# Altium PCB USB_HUB.PcbDoc
Units mm, origin at the board's own origin, x right, y up, seen from the top; angles counter-clockwise.
Board outline 67.31 x 59.69 mm, 4 copper layers (Top Layer, GND_1, GND_2, Bottom Layer), stack 0.603 mm thick; 57 components, 33 nets, 192 pads, 59 vias.
Unrouted connection lines stored in the file: 5.
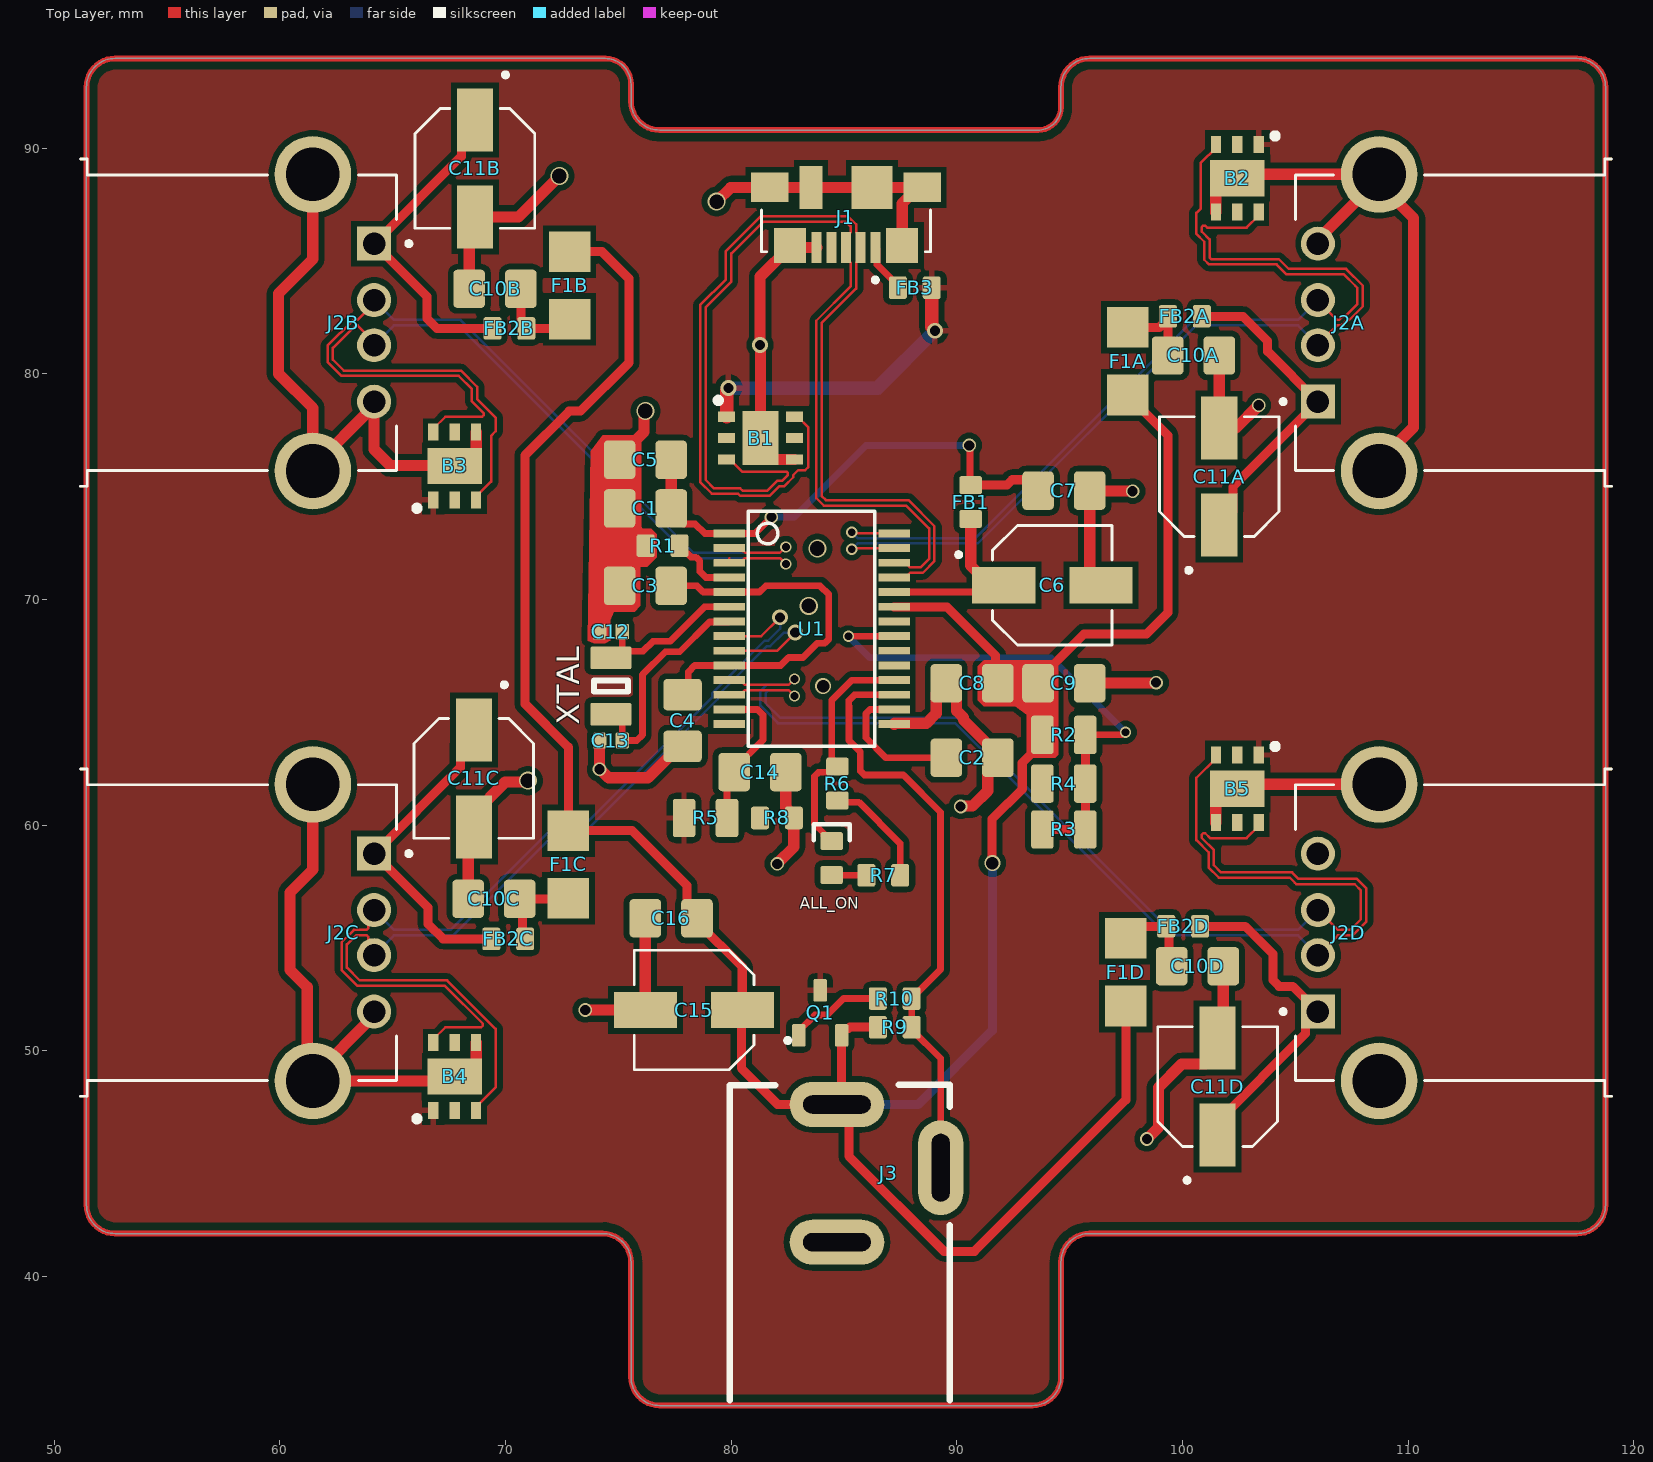
[diagram p0: Top Layer view]
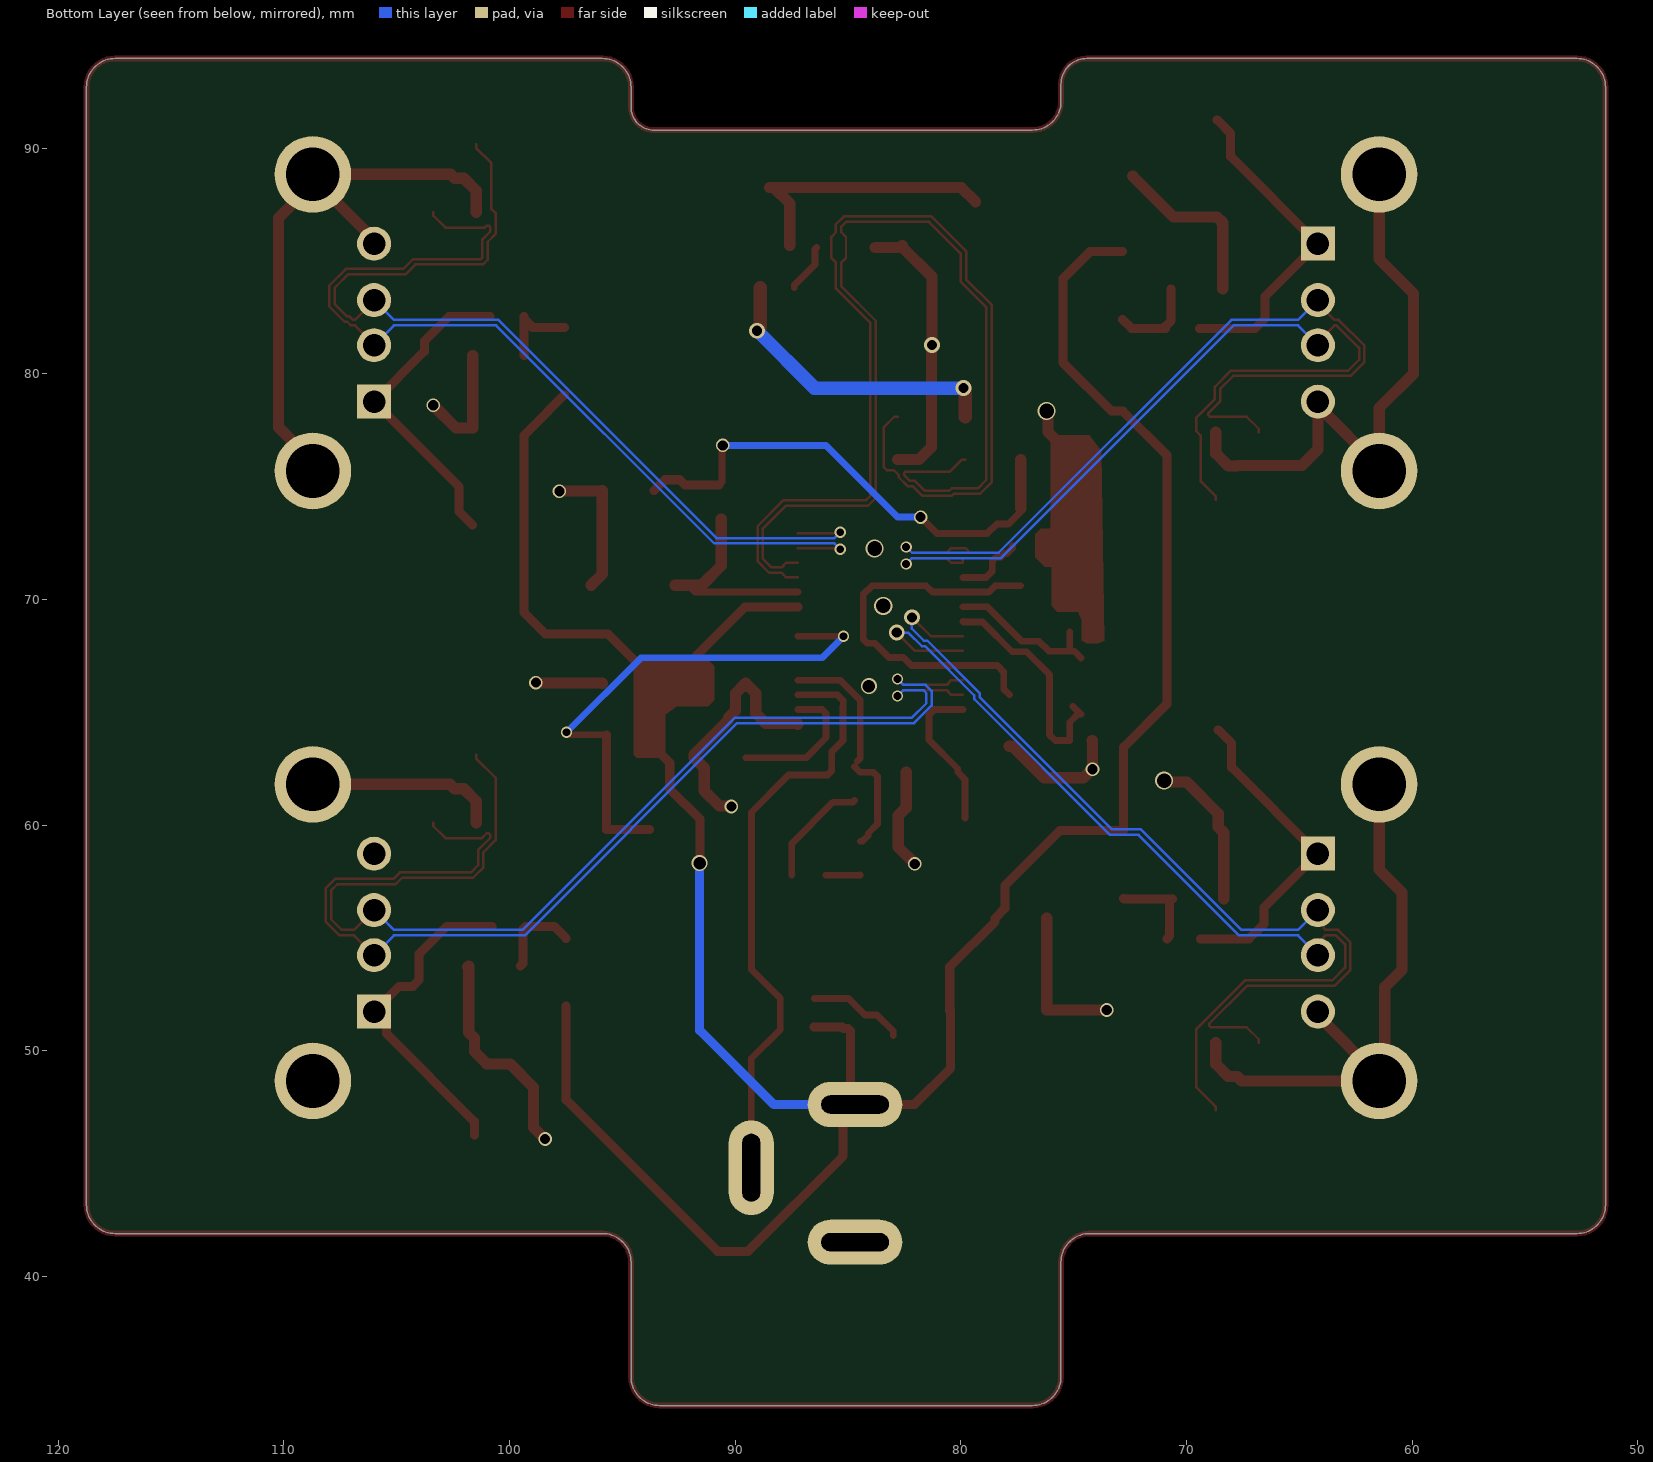
[diagram p1: Bottom Layer view, seen from below]
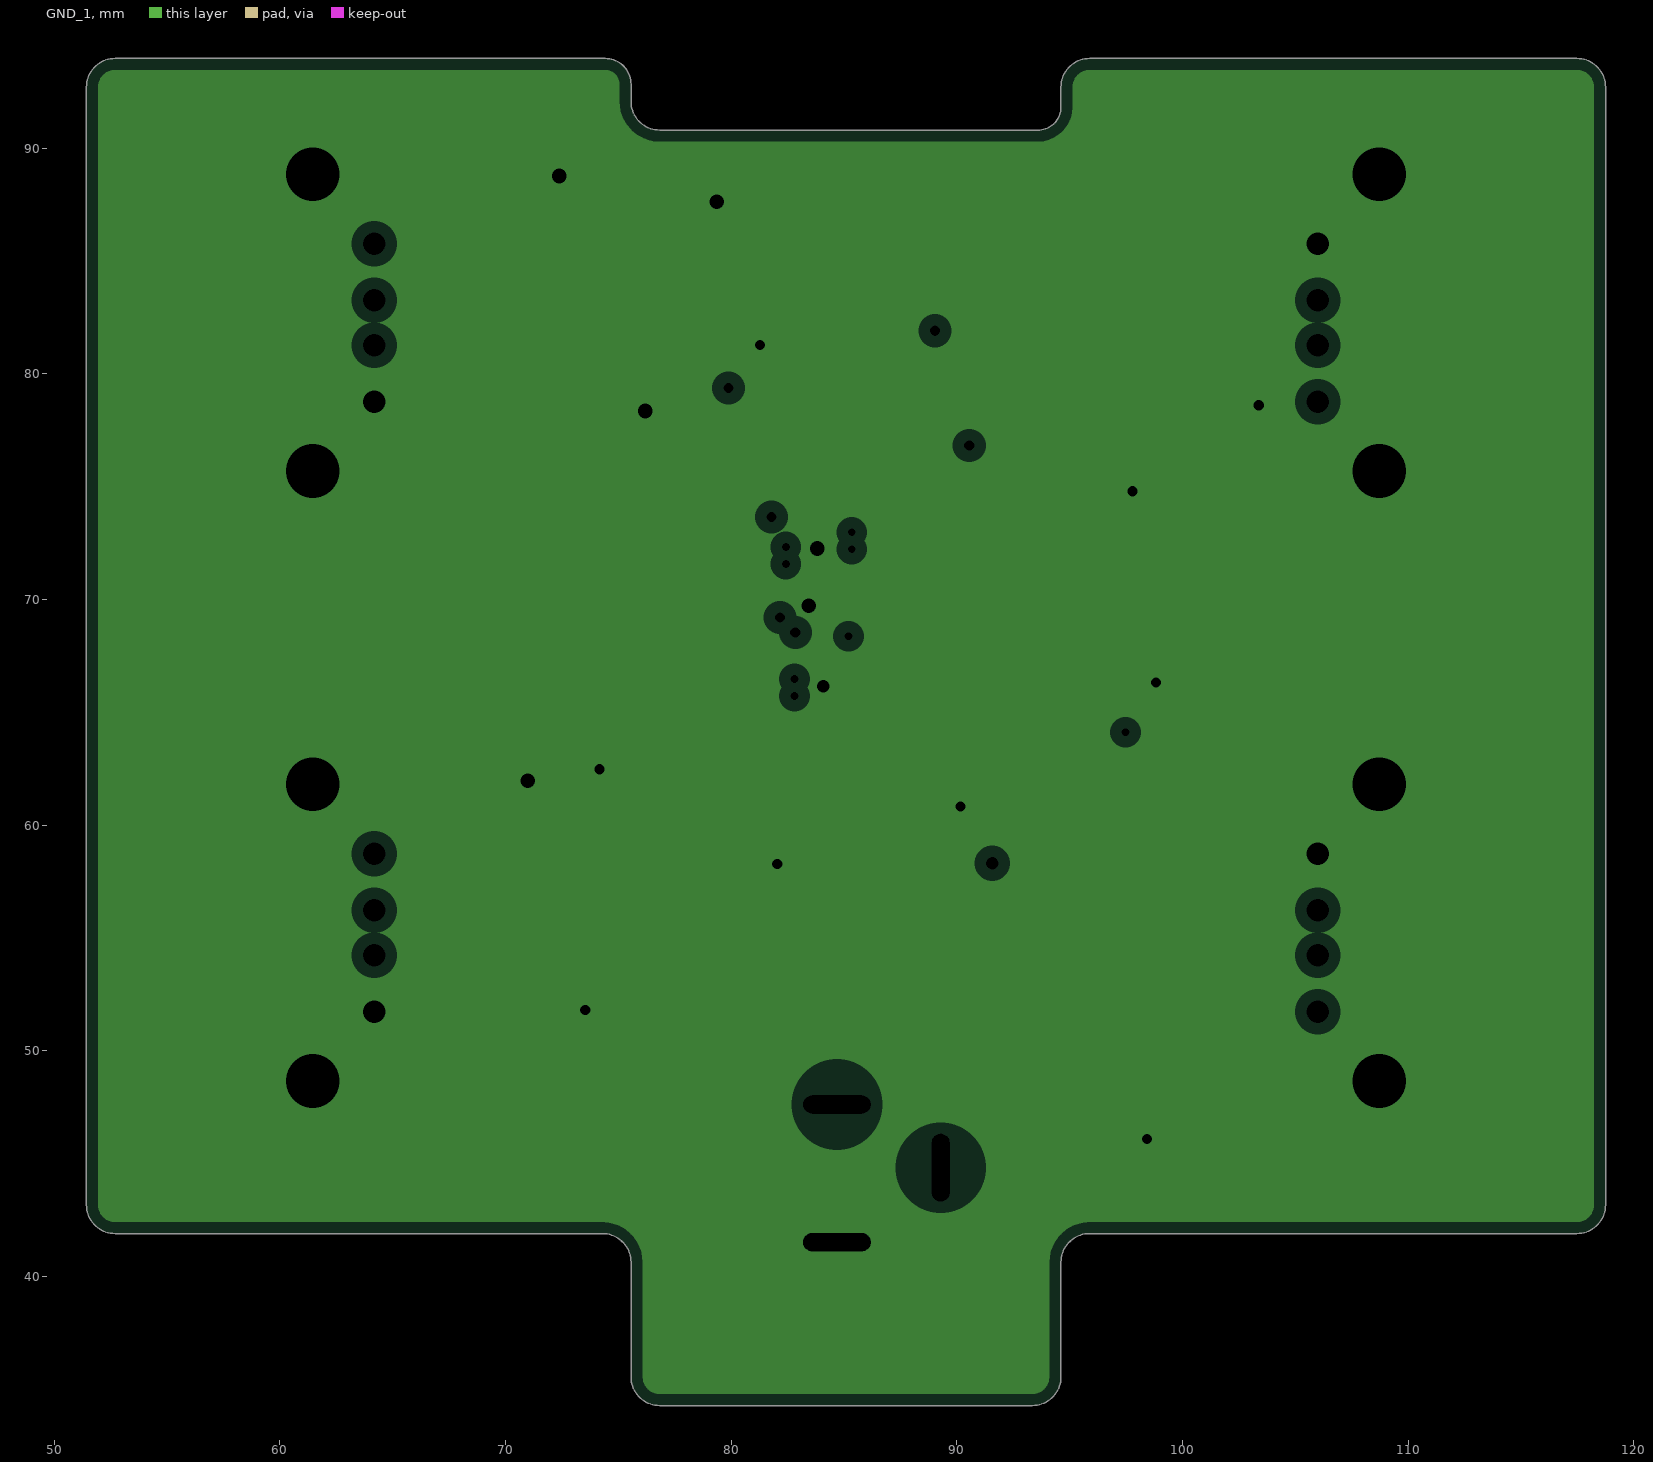
[diagram p2: GND_1, clearances drawn from the general rule]
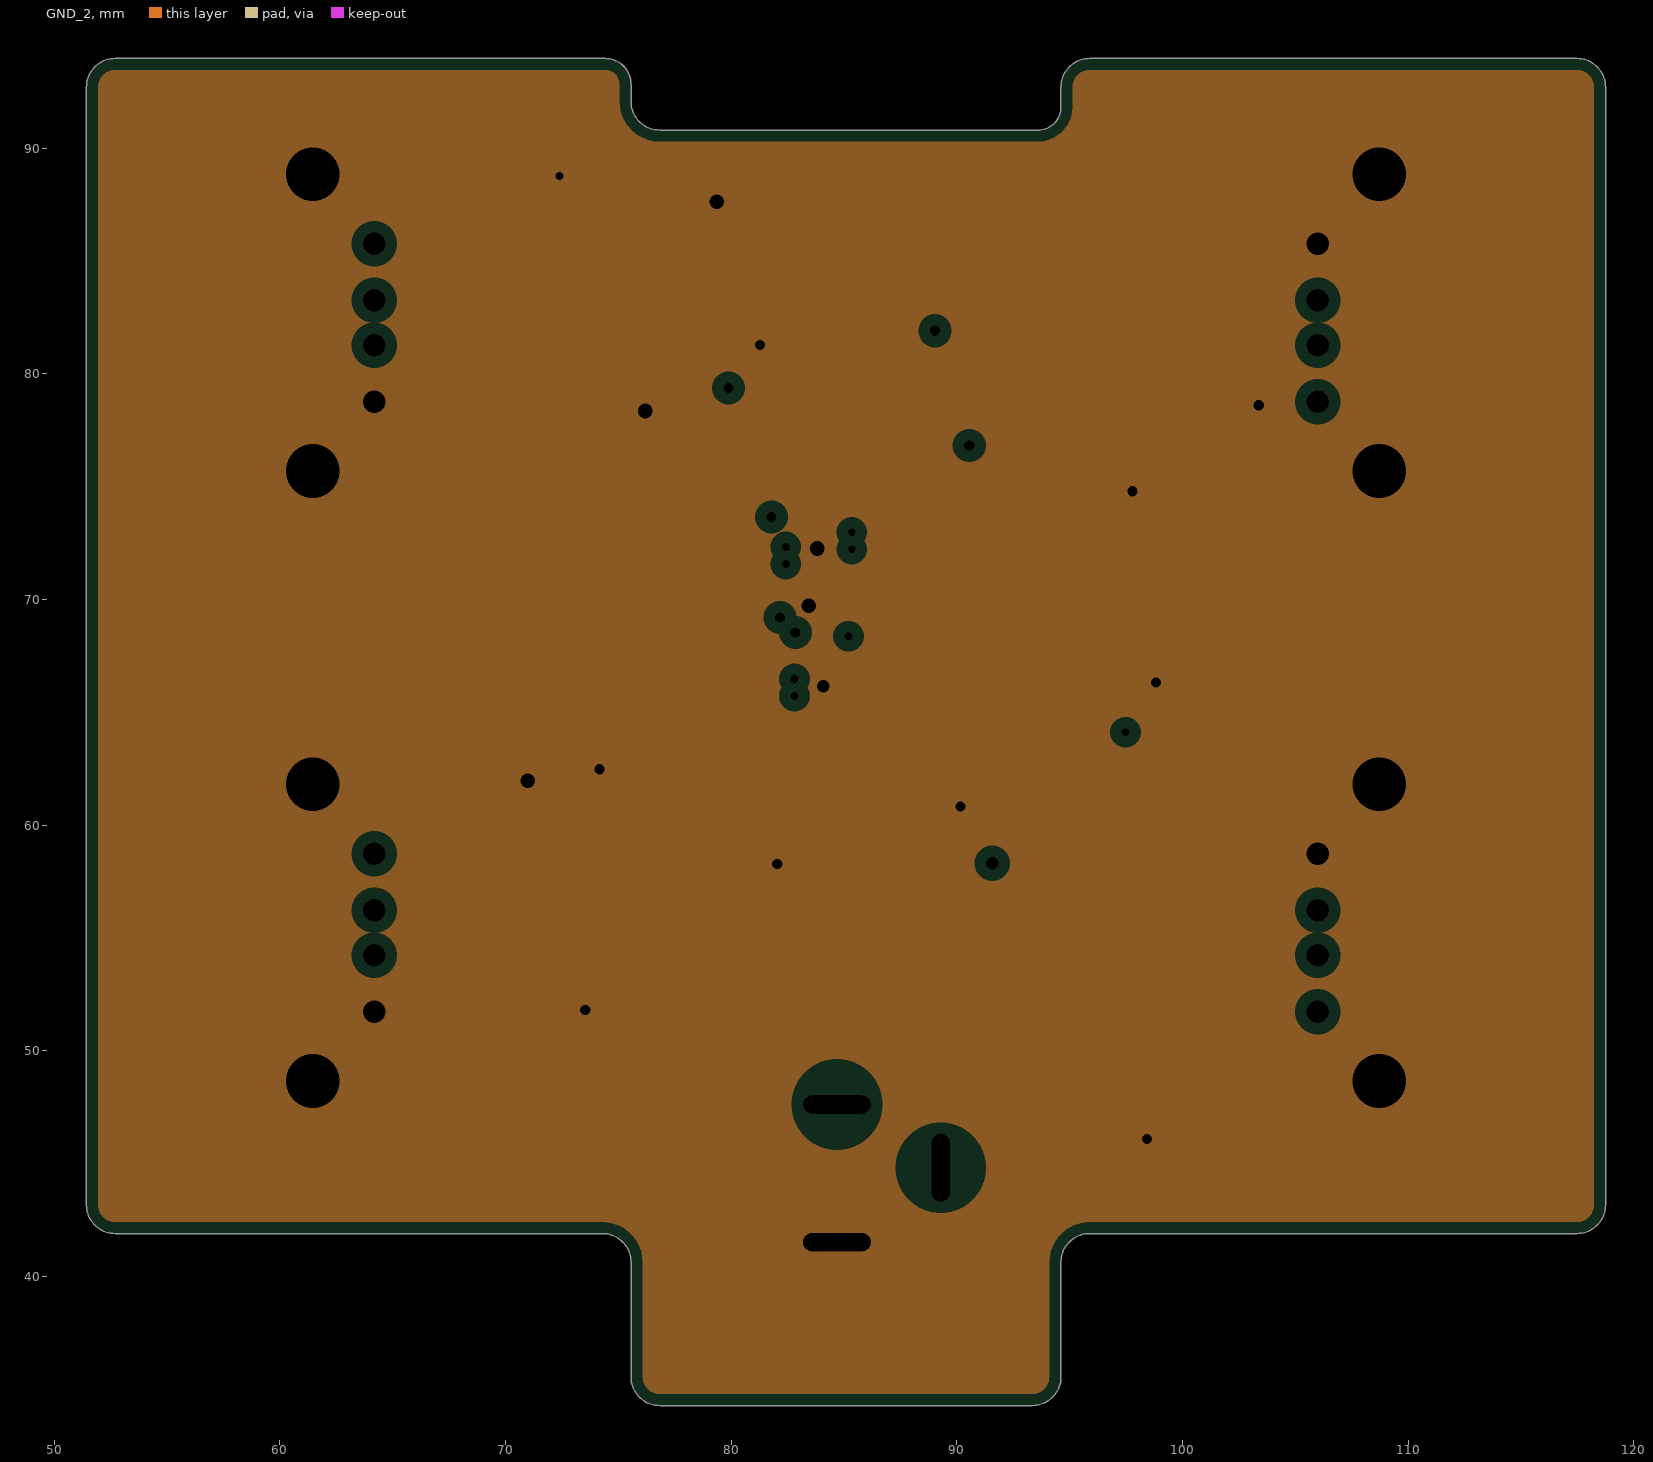
[diagram p3: GND_2, clearances drawn from the general rule]
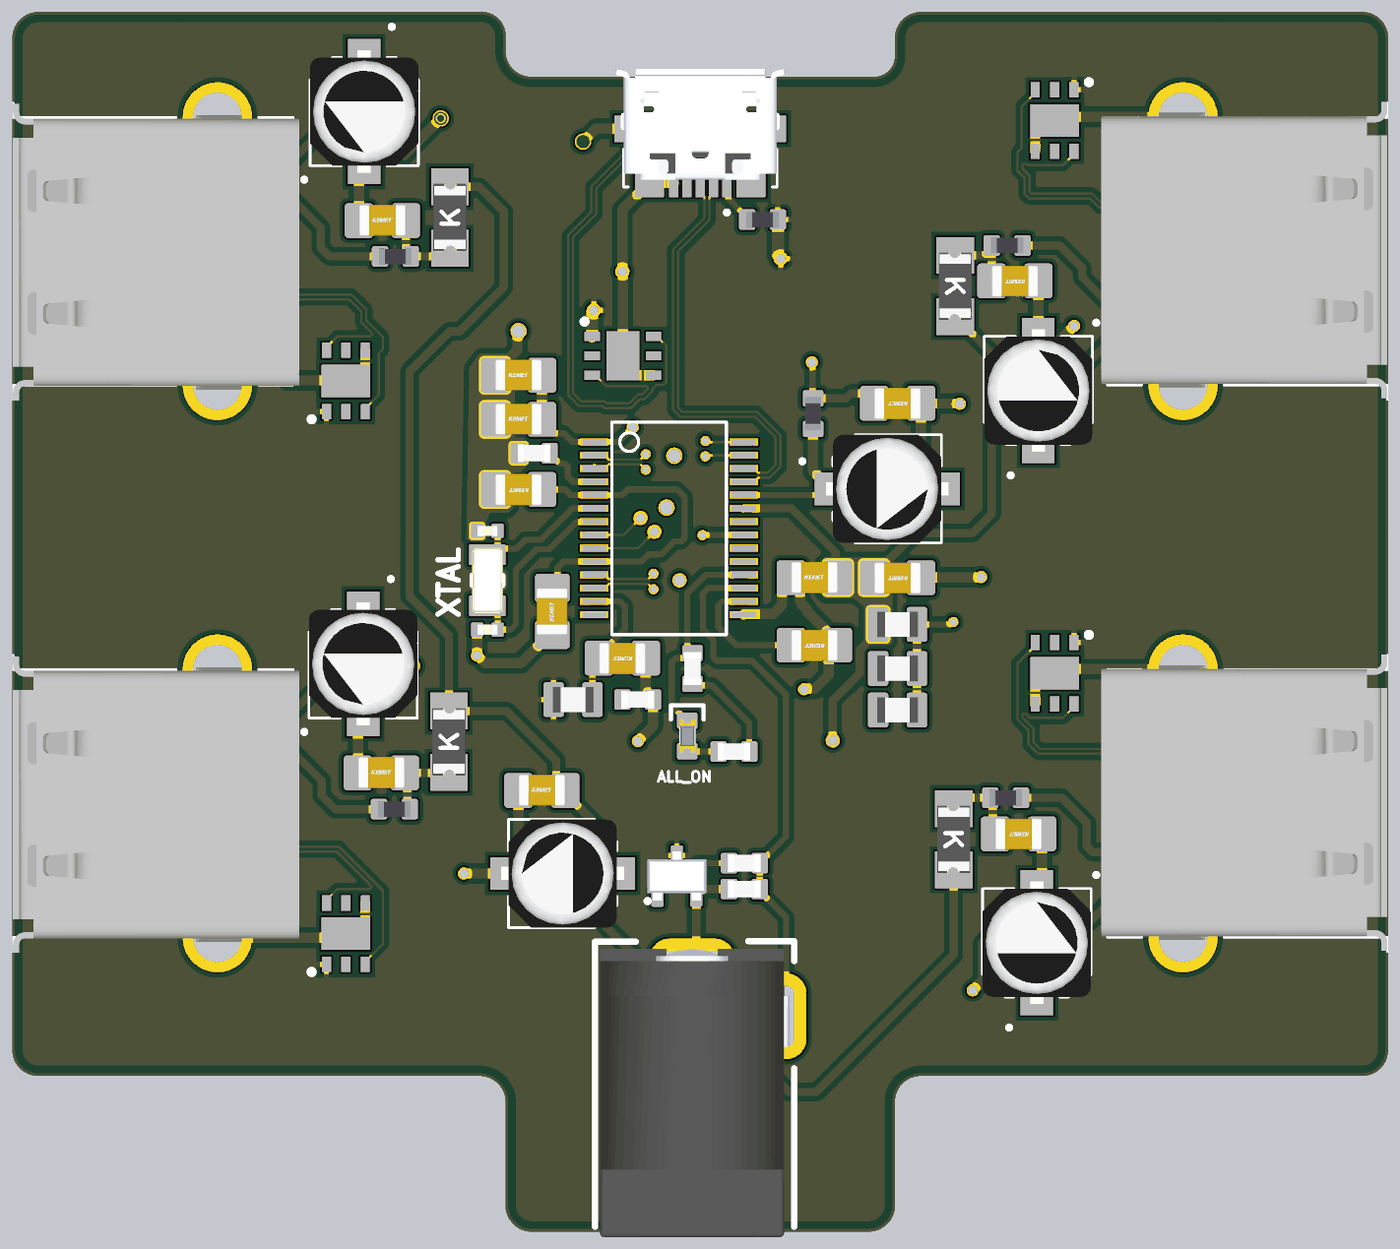
[diagram p4: 3D render of the assembled board from above, using the file's embedded part models]

## Layer stack, top to bottom
Top Solder: solder mask 0.0102, Solder Resist, Dk 3.5
Top Layer: signal copper 0.0356
Dielectric 2: prepreg 0.0711, PP-006, Dk 4.1
GND_1: plane copper 0.035, net GND
Dielectric 1: dielectric 0.32, FR-4, Dk 4.8
GND_2: plane copper 0.035, net GND
Dielectric 3: prepreg 0.0711, PP-006, Dk 4.1
Bottom Layer: signal copper 0.0356
Bottom Solder: solder mask 0.0102, Solder Resist, Dk 3.5

## Board outline
53.975,41.91 74.295,41.91 cw(c74.295,40.64) 75.565,40.64 75.565,35.56 ccw(c76.835,35.56) 76.835,34.29 93.345,34.29 ccw(c93.345,35.56) 94.615,35.56 94.615,40.64 cw(c95.885,40.64) 95.885,41.91 117.475,41.91 ccw(c117.475,43.18) 118.745,43.18 118.745,92.71 ccw(c117.475,92.71) 117.475,93.98 95.885,93.98 ccw(c95.885,92.71) 94.615,92.71 94.615,91.821 cw(c93.599,91.821) 93.599,90.805 76.835,90.805 cw(c76.835,92.075) 75.565,92.075 75.565,92.837 ccw(c74.422,92.837) 74.422,93.98 52.705,93.98 ccw(c52.705,92.71) 51.435,92.71 51.435,43.18 ccw(c52.705,43.18) 52.705,41.91

## Design rules (kind name [scope] priority, off if disabled: settings)
BoardOutlineClearance [All] p1: gap=0.5 ignorepadtopadclearanceinfootprint=FALSE
Clearance Clearance_diff_pair [All] p1: gap=0.25 ignorepadtopadclearanceinfootprint=FALSE except(0: Arc-Hole Track-Hole SMDPad-Hole THPad-Hole Via-Hole Fill-Hole Poly-Hole Region-Hole Text-Hole; 0.05: Arc-Text Track-Text SMDPad-Text THPad-Text Via-Text Fill-Text Poly-Text Region-Text Text-Text; 0.1: Arc-SMDPad Arc-THPad Track-SMDPad Track-THPad; 0.127: Arc-Arc Arc-Track Track-Track; 0.15: SMDPad-SMDPad SMDPad-THPad; 0.2: Arc-Via Track-Via SMDPad-Via THPad-THPad THPad-Via; 0.254: Via-Via)
Clearance [All] p2: gap=0.2 ignorepadtopadclearanceinfootprint=FALSE except(0: Arc-Hole Track-Hole SMDPad-Hole THPad-Hole Via-Hole Fill-Hole Poly-Hole Region-Hole Text-Hole; 0.05: Arc-Text Track-Text SMDPad-Text THPad-Text Via-Text Fill-Text Poly-Text Region-Text Text-Text; 0.1: Arc-SMDPad Arc-THPad Track-SMDPad Track-THPad; 0.15: SMDPad-SMDPad SMDPad-THPad; 0.16: Arc-Arc Arc-Track Track-Track; 0.254: Via-Via)
DiffPairsRouting [All] p1: maxlimit=0.127 minlimit=0.127 mostfreqgap=0.127 toplayer_minwidth=0.11 toplayer_maxwidth=0.11 toplayer_prefwidth=0.11 bottomlayer_minwidth=0.11 bottomlayer_maxwidth=0.11 bottomlayer_prefwidth=0.11 impedanceprofiledriven=TRUE impedanceprofileid={FF0C8A2E-A87C-4AAE-903D-DC2CD0315F1A} impedanceprofilevalue=90.000000 maxuncoupledlength=12.7
PlaneClearance [All] p1: clearance=0.508
PlaneConnect [All] p1: planeconnectstyle=Relief reliefexpansion=0.508 reliefentries=4 reliefconductorwidth=0.254 reliefairgap=0.254
PolygonConnect [All] p1: connectstyle=Relief reliefconductorwidth=0.254 reliefentries=4 polygonreliefangle="90 Angle" airgapwidth=0.254
RoutingVias [All] p1: holewidth=0.35 width=0.5 viastyle="Through Hole" minholewidth=0.2 minwidth=0.35 maxholewidth=0.65 maxwidth=0.8
SolderMaskExpansion [All] p1: expansion=0.102 istentingtop=FALSE
UnRoutedNet [All] p1: checkbadconnections=TRUE
Width signal [All] p1: maxlimit=0.8 minlimit=0.16 preferedwidth=0.3 minimp=50.000000 maximp=50.000000 favimp=50.000000
Width power [InNet('+VCC') AND InNet('+5V') AND InNet('GND') AND InNet('AVDD')] p2: maxlimit=0.8 minlimit=0.16 preferedwidth=0.5 minimp=50.000000 maximp=50.000000 favimp=50.000000
26 further rules are at their usual default settings.

## Classes and differential pairs
component class U_PERIPHERAL: ALL_ON C12 C13 C14 R5 R6 R7 R8 XTAL
channel class DOWNSTREAM: DWNSTRM_1 DWNSTRM_2 DWNSTRM_3 DWNSTRM_4
component class MAIN: C1 C2 C3 C4 C5 C6 C7 C8 C9 FB1 R1 U1
component class HOST: B1 FB3 J1 R2 R3 R4
component class U_EX_POWER: C15 C16 J3 Q1 R9 R10
component class ESD_DWNSTRM: B2 B3 B4 B5
component class DWNSTRM_4: C10D C11D F1D FB2D J2D
component class DWNSTRM_3: C10C C11C F1C FB2C J2C
component class DWNSTRM_2: C10B C11B F1B FB2B J2B
component class DWNSTRM_1: C10A C11A F1A FB2A J2A
differential pair D4: +D4_P -D4_N
differential pair D3: +D3_P -D3_N
differential pair D2: +D2_P -D2_N
differential pair D1: +D1_P -D1_N
differential pair D0: +D0_P -D0_N

## Components (designator, comment, footprint, x,y, rotation, side; value= is the part's Value field where it differs from the comment)
ALL_ON "BLUE" LED_0603_BLUE 84.455,58.547 r270 top (schematic designator A_ON)
B1 "MAX3202EETT+T" SON95P300X300X80-7N 81.304,77.155 r0 top
B2 "MAX3202EETT+T" SON95P300X300X80-7N 102.428,88.67 r270 top
B3 "MAX3202EETT+T" SON95P300X300X80-7N 67.752,75.922 r90 top
B4 "MAX3202EETT+T" SON95P300X300X80-7N 67.752,48.871 r90 top
B5 "MAX3202EETT+T" SON95P300X300X80-7N 102.428,61.619 r270 top
C1 "100n" CAP_0805 76.2,74.041 r0 top
C2 "10u" CAP_0805 90.678,62.992 r180 top
C3 "100n" CAP_0805 76.2,70.612 r180 top
C4 "100n" CAP_0805 77.851,64.643 r90 top
C5 "100n" CAP_0805 76.2,76.2 r0 top
C6 "100u" CAP_EEEHA0J101WR 94.234,70.639 r0 top
C7 "100n" CAP_0805 94.742,74.83 r180 top
C8 "100n" CAP_0805 90.678,66.294 r0 top
C9 "100u" CAP_0805 94.742,66.294 r180 top
C10A "100n" CAP_0805 100.487,80.819 r180 top (schematic designator C10)
C10B "100n" CAP_0805 69.539,83.77 r0 top (schematic designator C10)
C10C "100n" CAP_0805 69.489,56.743 r0 top (schematic designator C10)
C10D "100n" CAP_0805 100.666,53.757 r180 top (schematic designator C10)
C11A "100u" CAP_EEEHA0J101WR 101.63,75.451 r90 top (schematic designator C11)
C11B "100u" CAP_EEEHA0J101WR 68.65,89.104 r270 top (schematic designator C11)
C11C "100u" CAP_EEEHA0J101WR 68.6,62.077 r270 top (schematic designator C11)
C11D "100u" CAP_EEEHA0J101WR 101.555,48.423 r90 top (schematic designator C11)
C12 "33p" CAP_0402 74.676,68.58 r0 top
C13 "33p" CAP_0402 74.676,63.754 r0 top
C14 "100n" CAP_0805 81.28,62.357 r180 top
C15 "100u" CAP_EEEHA0J101WR 78.359,51.816 r180 top
C16 "C0805" CAP_0805 77.343,55.88 r0 top
F1A "550mA 6V" FUSE_1206 97.566,80.565 r270 top (schematic designator F1)
F1B "550mA 6V" FUSE_1206 72.841,83.921 r90 top (schematic designator F1)
F1C "550mA 6V" FUSE_1206 72.791,58.267 r90 top (schematic designator F1)
F1D "550mA 6V" FUSE_1206 97.491,53.491 r270 top (schematic designator F1)
FB1 "100R" FB_0603 90.613,74.322 r90 top
FB2A "100R" FB_0603 100.106,82.551 r180 top (schematic designator FB2)
FB2B "100R" FB_0603 70.174,82.016 r0 top (schematic designator FB2)
FB2C "100R" FB_0603 70.124,54.965 r0 top (schematic designator FB2)
FB2D "100R" FB_0603 100.031,55.523 r180 top (schematic designator FB2)
FB3 "100R" FB_0603 88.138,83.82 r0 top
J1 "47346-0001" MOLEX_47346-0001 85.09,88.265 r180 top
J2A "87520-0010BLF" AMPHENOL_87520-0010BLF 108.712,82.272 r90 top (schematic designator J2)
J2B "87520-0010BLF" AMPHENOL_87520-0010BLF 61.468,82.272 r270 top (schematic designator J2)
J2C "87520-0010BLF" AMPHENOL_87520-0010BLF 61.468,55.245 r270 top (schematic designator J2)
J2D "87520-0010BLF" AMPHENOL_87520-0010BLF 108.712,55.245 r90 top (schematic designator J2)
J3 "CON-SOCJ-2155" CON-SOCJ-2155 84.689,41.529 r0 top
Q1 "2N7002NXAKR" SSM3J338R,LF-SOT23-F 83.947,51.689 r0 top
R1 "500R" RES_0603 76.962,72.39 r0 top
R2 "10K" RES_0805 94.742,64.008 r180 top
R3 "10K" RES_0805 94.742,59.817 r0 top
R4 "10K" RES_0805 94.742,61.849 r0 top
R5 "10K" RES_0805 78.867,60.325 r180 top
R6 "100K" RES_0603 84.709,61.849 r270 top
R7 "510R" RES_0603 86.741,57.785 r0 top
R8 "47K" RES_0603 82.03,60.325 r180 top
R9 "510R" RES_0603 87.249,51.054 r0 top
R10 "4.7K" RES_0603 87.249,52.324 r0 top
U1 "GL850G" SSOP28 83.566,68.707 r270 top
XTAL "XTAL_3215" XTAL_3215-2 74.676,66.167 r270 top

## Footprints (in the part's own frame and the unit in brackets; to place one, negate y for a bottom-side part, rotate by r counter-clockwise, add the part's x,y. Pads: shape width x height; smd on the part's side, far side on the other; paste and mask are expansions set on the pad)
AMPHENOL_87520-0010BLF [mm]
  rect 1.508x1.508 / inner round 1.508 / far side rect 1.508x1.508 hole 1 mask+0.05: 1(-3.5,2.71)
  round 1.508 hole 1 mask+0.05: 2(-1,2.71) 3(1,2.71) 4(3.5,2.71)
  round 3.396 hole 2.38 mask+0.05: SH1(-6.57,0) SH2(6.57,0)
  silkscreen extent -7.25,-10.3 7.25,4.35, body extent -7.2,-10 7.3,4, height 7.74
CAP_0402 [mm]
  rrect25% 0.6x0.7 smd: 1(-0.5,0) 2(0.5,0)
  body extent -0.5,-0.26 0.5,0.26, height 0.37
CAP_0805 [mm]
  rrect25% 1.4x1.7 smd: 1(-1.143,0) 2(1.143,0)
  body extent -1.15,-0.76 1.15,0.79, height 1.01
CAP_EEEHA0J101WR [mm]
  rect 2.8x1.6 smd: 1(-2.15,0) 2(2.15,0)
  silkscreen extent -4.25,-2.65 2.65,2.65, body extent -3,-2.65 3,2.65, height 5.8
CON-SOCJ-2155 [mm]
  oval 4.2x2 hole 0.8 slot 3 at 0 deg: 1(0,6.1) 2(0,0)
  oval 2x4.2 hole 0.8 slot 3 at 90 deg: 3(4.6,3.3)
  silkscreen extent -4.75,-7 5,6.98, body extent -4.5,-7.5 4.75,6.6, height 11.11
FB_0603 [mm]
  rrect25% 0.8x1 smd: 1(-0.75,0) 2(0.75,0)
  body extent -0.8,-0.4 0.8,0.4, height 0.81
FUSE_1206 [mm]
  rect 1.8x1.84 smd: 1(-1.5,0) 2(1.5,0)
  body extent -1.65,-0.82 1.65,0.81, height 0.84
LED_0603_BLUE [mm]
  rrect25% 0.8x1 smd: A(0.75,0) K(-0.75,0)
  silkscreen extent -1.5,-0.8 -0.8,0.8, body extent -0.8,-0.4 0.8,0.4, height 0.6
MOLEX_47346-0001 [mm]
  rect 0.45x1.38 smd: 1(-1.3,2.66) 2(-0.65,2.66) 3(0,2.66) 4(0.65,2.66) 5(1.3,2.66)
  rect 1.425x1.55 smd: S1(-2.488,2.575) S2(2.488,2.575)
  rect 1.65x1.3 smd: S3(-3.375,0) S6(3.375,0)
  rect 1.8x1.9 smd: S4(-1.15,0)
  rect 1x1.9 smd: S5(1.55,0)
  silkscreen extent -3.75,1 3.75,4.2, body extent -4.18,-2.93 4.18,2.5, height 2.7
RES_0603 [mm]
  rrect25% 0.8x1 smd: 1(-0.75,0) 2(0.75,0)
  body extent -0.8,-0.43 0.8,0.43, height 0.52
RES_0805 [mm]
  rrect25% 1x1.7 smd: 1(-0.95,0) 2(0.95,0)
  body extent -1,-0.63 1,0.63, height 0.47
SON95P300X300X80-7N [mm]
  rect 0.75x0.45 smd: 1(-1.5,0.95) 2(-1.5,0) 3(-1.5,-0.95) 4(1.5,-0.95) 5(1.5,0) 6(1.5,0.95)
  rect 1.6x2.4 smd: 7(0,0)
  silkscreen extent -2,1.55 -1.75,1.8
SSM3J338R,LF-SOT23-F [mm]
  rrect25% 0.6x1 smd: D(0,1) G(-0.95,-1) S(0.95,-1)
  body extent -1.45,-1.2 1.45,1.2, height 0.91
SSOP28 [mm]
  rect 0.348x1.397 smd paste-2: 1(-4.225,-3.656) 2(-3.575,-3.656) 3(-2.925,-3.656) 4(-2.275,-3.656) 5(-1.625,-3.656) 6(-0.975,-3.656) 7(-0.325,-3.656) 8(0.325,-3.656) 9(0.975,-3.656) 10(1.625,-3.656) 11(2.275,-3.656) 12(2.925,-3.656) 13(3.575,-3.656) 14(4.225,-3.656) 15(4.225,3.656) 16(3.575,3.656) 17(2.925,3.656) 18(2.275,3.656) 19(1.625,3.656) 20(0.975,3.656) 21(0.325,3.656) 22(-0.325,3.656) 23(-0.975,3.656) 24(-1.625,3.656) 25(-2.275,3.656) 26(-2.925,3.656) 27(-3.575,3.656) 28(-4.225,3.656)
  silkscreen extent -5.2,-2.8 5.2,2.8
XTAL_3215-2 [mm]
  rrect10% 1x1.8 smd: 1(-1.25,0) 2(1.25,0)
  silkscreen extent -0.25,-0.75 0.25,0.75, body extent -1.6,-0.75 1.6,0.75, height 0.91

## Part data
ALL_ON: library part LED_0603_BLUE, "LED 0603 BLUE SMD"
B1 B2 B3 B4 B5: "ESD Suppressors / TVS Diodes Low-Capacitance, 2/3/4/6-Channel, 15kV ESD-Protection Arrays for High-Speed Data Interfaces", Manufacturer_Name="Analog Devices", Mouser Part Number=700-MAX3202EETTT, Datasheet Link=https://pdfserv.maximintegrated.com/en/ds/MAX3202E-MAX3206E.pdf, Geometry.Height=0.8mm, Manufacturer_Part_Number=MAX3202EETT+T, Mouser Price/Stock=https://www.mouser.co.uk/ProductDetail/Analog-Devices-Maxim-Integrated/MAX3202EETT%2bT?qs=8wHch9UpSvZOsR663CaSvw%3D%3D
C1 C2 C3 C4 C5 C7 C8 C9 C10A C10B C10C C10D C14 C16: library part CAP_0805, "Capacitor SMD 0805"
C6 C11A C11B C11C C11D C15: library part EEEHA0J101WR, "CAPACITOR ALUM ELEC, 100UF, 20%, 6.3V, S; CAPACITOR ALUM ELEC, 100UF, 20%, 6.3V, SMD; Product Range:PANASONIC - HA Series; Capacitance:100ÂµF; Capacitance Tolerance:Â± 20%; Voltage Rating:6.3V; Capacitor Case Style:Radial Can - SMD; Diameter:5mm; Height:5.4mm; Series:HA", Package="RADIAL-2 Panasonic", Availability="In Stock", Check_prices=https://www.snapeda.com/parts/EEE-HA0J101WR/Panasonic%20Electronic%20Components/view-part/2733110/?ref=eda, MF="Panasonic Electronic", MP=EEE-HA0J101WR, Price=None, Purchase-URL=https://pricing.snapeda.com/search/part/EEE-HA0J101WR/?ref=eda, SnapEDA_Link=https://www.snapeda.com/parts/EEE-HA0J101WR/Panasonic%20Electronic%20Components/view-part/2733110/?ref=snap
C12 C13: library part CAP_0402, "Capacitor SMD 0402"
F1A F1B F1C F1D: library part FUSE_PPTC_1206, "Fuse PPTC SMD 1206"
FB1 FB2A FB2B FB2C FB2D FB3: library part FB_0603, "Ferrite Bead SMD 0603"
J1: "USB - micro B USB 2.0 Receptacle Connector 5 Position Surface Mount, Right Angle", Package=None, Availability="In Stock", Check_prices=https://www.snapeda.com/parts/47346-0001/Molex/view-part/?ref=eda, MF=Molex, MP=47346-0001, Price=None, Purchase-URL=https://pricing.snapeda.com/search/part/47346-0001/?ref=eda, SnapEDA_Link=https://www.snapeda.com/parts/47346-0001/Molex/view-part/?ref=snap
J2A J2B J2C J2D: "Conn Data USB TypeA Socket 4Cnts RightAngle ThruHole White 1.57mmPCB", Package=None, Check_prices=https://www.snapeda.com/parts/87520-0010BLF/Amphenol/view-part/?ref=eda, MF="AMPHENOL ICC / FCI", MP=87520-0010BLF, SnapEDA_Link=https://www.snapeda.com/parts/87520-0010BLF/Amphenol/view-part/?ref=snap
J3: "DC Barrell Jack 2.1mm 30V 2.5A THT", Manufacturer=Gravitech, Manufacturer Part Number=CON-SOCJ-2155
Q1: "MOSFET N-Channel Vds=60V Id=300mA with ESD Protection", Manufacturer=Nexperia, Manufacturer Part Number=2N7002NXAKR
R1 R6 R7 R8 R9 R10: library part RES_0603, "Resistor SMD 0603"
R2 R3 R4 R5: library part RES_0805, "Resistor SMD 0805"
U1: "Programmable Logic IC Development Tools", Manufacturer="Vishay Intertechnology", Package=None, Availability="Not in stock", Check_prices=https://www.snapeda.com/parts/GL850G/Vishay/view-part/?ref=eda, Manufacturer Part Number=GL850G, Price=None, SnapEDA_Link=https://www.snapeda.com/parts/GL850G/Vishay/view-part/?ref=snap
XTAL: "Crystal SMD 3215"

## Via types
v1: diameter 0.6, hole 0.45, GND_2 to Bottom Layer, 10 vias
v2: diameter 0.6, hole 0.45, Top Layer to GND_2, 10 vias
v3: diameter 0.5, hole 0.35, GND_2 to Bottom Layer, 9 vias
v4: diameter 0.5, hole 0.35, Top Layer to GND_2, 9 vias
v5: diameter 0.7, hole 0.45, GND_2 to Bottom Layer, 5 vias
v6: diameter 0.7, hole 0.45, Top Layer to GND_2, 5 vias
v7: diameter 0.8, hole 0.65, Top Layer to Bottom Layer, 3 vias
v8: diameter 0.8, hole 0.65, Top Layer to GND_2, 3 vias
v9: diameter 0.7, hole 0.55, Top Layer to Bottom Layer, 2 vias
v10: diameter 0.8, hole 0.65, Top Layer to GND_1, 2 vias
v11: diameter 0.8, hole 0.65, GND_2 to Bottom Layer, 1 vias

## Nets (pads, with @x,y where several pads share a name; then routed paths per layer and width w, separated by ;. In a path a pad name is that pad's centre, name@x,y a point inside that pad or via, vN(x,y) a via of type N, cw(c..) or ccw(c..) an arc to the next point about the centre after c; other vN are vias at no path point)
+5V: B1.1 B2.1 B3.1 B4.1 B5.1 FB3.2 Q1.D R5.2 | length 13.5
  Top Layer w0.6: B1.1 79.804,79.269 79.883,79.348 v6(79.883,79.375) ; FB3.2 88.888,82.081 89.027,81.942 v5(89.027,81.915)
  Bottom Layer w0.6: v6(79.883,79.375) 86.487,79.375 v5(89.027,81.915)
  other v5: 79.883,79.375
  other v6: 89.027,81.915
+VCC: C8.2 C9.2 C15.1 C16.2 F1A.2 F1B.2 F1C.2 F1D.2 J3.1 Q1.S R2.2 R9.1 U1.23 | length 127.4
  Top Layer w0.4: F1B.2 74.279,85.421 75.475,84.225 75.475,80.5 73.325,78.35 72.825,78.35 70.866,76.391 70.866,65.384 72.791,63.459 F1C.2 75.611,59.767 78.048,57.33 78.048,56.318 C16.2 78.486,55.73 80.493,53.723 80.493,51.8 80.45,51.8 80.45,49.244 82.065,47.629 J3.1 ; R9.1 85.262,51.054 85.197,50.989 84.997,50.989 84.897,50.889 Q1.S 84.897,47.837 J3.1 ; U1.23 89.56,69.682 91.712,67.53 91.712,66.403 C8.2 ; v3(91.575,58.325) 91.562,58.338 91.562,60.287 92.25,60.975 92.275,60.975 92.9,61.6 92.9,62.766 93.792,63.658 R2.2 ; C9.2 93.599,66.444 95.63,68.475 98.4,68.475 99.35,69.425 99.35,77.281 98.286,78.345 98.286,78.365 97.586,79.065 F1A.2 ; F1D.2 97.491,47.834 90.78,41.123 89.433,41.123 85.217,45.339 85.217,47.101 J3.1
  Bottom Layer w0.4: J3.1@83.165,47.629 J3.1 88.288,47.629 91.575,50.916 v3(91.575,58.325)
  other v9: 91.575,58.325
AVDD: C1.2 C2.2 C3.1 C4.2 C5.2 C7.2 FB1.2 U1.1 U1.5 U1.10 U1.16 | length 46.1
  Top Layer w0.3: C3.1 78.486,70.612 78.762,70.336 81.258,70.336 81.534,70.612 83.947,70.612 84.328,70.231 84.328,68.248 84.152,68.072 83.82,68.072 83.185,67.437 82.55,67.437 82.195,67.082 U1.10 78.385,67.082 78.105,66.802 78.105,66.04 C4.2 ; C1.2 77.343,73.905 77.891,73.356 78.409,73.356 78.833,72.932 U1.1 81.06,72.932 v2(81.788,73.66) ; U1.16 86.155,65.132 85.979,64.956 85.979,63.881 86.868,62.992 C2.2 ; v1(90.551,76.835) 90.582,76.804 90.582,75.203 FB1.2@90.713,75.072
  Top Layer w0.4: FB1.2@90.713,75.072 92.217,75.072 92.456,75.311 93.118,75.311 C7.2
  Top Layer w0.5: C1.2 C5.2
  Bottom Layer w0.3: v2(81.788,73.66) 82.804,73.66 85.979,76.835 v1(90.551,76.835)
  other v1: 81.788,73.66
  other v2: 90.551,76.835
D0_N: B1.6 J1.2 U1.25 | length 47.5
  Top Layer w0.11: B1.6 82.954,78.105 83.425,77.634 83.425,75.875 83.285,75.735 82.972,75.735 82.752,75.514 82.752,75.421 82.357,75.026 82.138,75.026 81.705,74.593 80.408,74.593 80.308,74.693 79.15,74.693 78.63,75.213 78.63,83.05 79.773,84.193 79.773,85.442 81.309,86.978 85.187,86.978 85.534,86.632 85.534,86.276 85.74,86.07 J1.2 85.74,85.14 85.534,84.934 85.534,83.782 84.01,82.258 84.01,74.597 84.201,74.405 87.855,74.405 89.01,73.25 89.01,71.708 88.49,71.188 88.086,71.188 87.93,71.188 87.865,71.124 87.865,71.101 87.746,70.982 U1.25
D0_P: B1.3 J1.3 U1.26 | length 45.2
  Top Layer w0.11: B1.3 79.954,76.205 80.484,75.675 82.449,75.675 82.514,75.61 82.514,75.519 82.258,75.263 82.039,75.263 81.606,74.83 80.506,74.83 80.406,74.93 79.248,74.93 78.867,75.311 78.867,82.951 80.01,84.094 80.01,85.344 81.407,86.741 85.089,86.741 85.296,86.533 85.296,86.276 85.09,86.07 J1.3 85.09,85.14 85.296,84.934 85.296,83.88 83.772,82.356 83.772,74.498 84.103,74.168 87.757,74.168 88.773,73.152 88.773,71.807 88.392,71.426 88.184,71.426 87.93,71.426 87.865,71.49 87.865,71.513 87.746,71.632 U1.26
D1_N: B2.6 J2A.2 U1.27 | length 42.4
  Top Layer w0.11: v3(85.344,72.23) 85.396,72.282 U1.27 ; B2.6 103.378,87.02 102.845,86.487 101.092,86.487 101.008,86.571 100.917,86.571 100.852,86.506 100.852,86.306 101.201,85.957 101.201,85.156 101.266,85.091 104.266,85.091 104.707,84.65 107.247,84.65 107.991,83.906 107.991,83.001 107.303,82.313 107.188,82.313 107.029,82.153 106.839,82.153 106.002,81.316 J2A.2
  Bottom Layer w0.11: v3(85.344,72.23) 85.602,72.488 90.93,72.488 100.595,82.153 105.121,82.153 J2A.2
  other v4: 85.344,72.23
D1_P: B2.3 J2A.3 U1.28 | length 43.1
  Top Layer w0.11: v3(85.344,72.984) 85.396,72.932 U1.28 ; B2.3 101.478,90.02 100.818,89.36 100.818,87.335 100.615,87.131 100.615,86.208 100.964,85.859 100.964,85.058 101.167,84.854 104.167,84.854 104.609,84.413 107.149,84.413 107.655,83.906 107.753,83.808 107.753,83.099 107.205,82.55 107.09,82.55 106.93,82.391 106.839,82.391 106.002,83.228 J2A.3
  Bottom Layer w0.11: v3(85.344,72.984) 85.602,72.726 90.831,72.726 100.496,82.391 105.121,82.391 J2A.3
  other v4: 85.344,72.984
D2_N: B3.6 J2B.2 U1.2 | length 40.6
  Top Layer w0.11: J2B.2 64.178,83.12 63.449,82.391 63.259,82.391 62.12,81.251 62.12,80.53 62.737,79.913 67.932,79.913 68.51,79.334 68.51,78.786 69.035,78.261 69.035,78.17 68.97,78.105 67.335,78.105 66.802,77.572 B3.6 ; U1.2@79.673,72.163 79.791,72.282 U1.2 80.435,72.282 80.553,72.163 80.553,72.14 80.618,72.076 82.165,72.076 v4(82.423,72.334)
  Bottom Layer w0.11: J2B.2 65.059,82.391 68.013,82.391 78.328,72.076 82.165,72.076 v4(82.423,72.334)
  other v3: 82.423,72.334
D2_P: B3.3 J2B.3 U1.3 | length 41.7
  Top Layer w0.11: J2B.3 64.178,81.424 63.449,82.153 63.357,82.153 62.357,81.153 62.357,80.628 62.835,80.15 68.03,80.15 68.748,79.432 68.748,78.884 69.565,78.067 69.565,77.461 69.362,77.257 69.362,75.232 68.702,74.572 B3.3 ; 79.91,71.838 U1.3 80.435,71.632 80.553,71.751 80.553,71.774 80.618,71.838 82.165,71.838 v4(82.423,71.58)
  Bottom Layer w0.11: J2B.3 65.059,82.153 67.915,82.153 78.23,71.838 82.165,71.838 v4(82.423,71.58)
  other v3: 82.423,71.58
D3_N: B4.6 J2C.2 U1.8 | length 40.6
  Top Layer w0.11: J2C.2 63.915,55.982 63.915,55.428 63.85,55.364 63.283,55.364 62.738,54.819 62.738,53.594 63.444,52.888 67.317,52.888 68.995,51.21 68.995,51.119 68.93,51.054 67.335,51.054 66.802,50.521 B4.6 ; U1.8 81.336,68.382 v6(82.169,69.215)
  Bottom Layer w0.11: J2C.2 65.059,55.364 67.572,55.364 72.026,59.817 73.296,59.817 79.169,65.691 79.169,65.858 81.487,68.176 81.636,68.176 82.169,68.708 v6(82.169,69.215)
  other v5: 82.169,69.215
D3_P: B4.3 J2C.3 U1.9 | length 42.7
  Top Layer w0.11: J2C.3 63.915,54.508 63.915,55.062 63.85,55.126 63.381,55.126 62.975,54.72 62.975,53.692 63.543,53.125 67.416,53.125 69.565,50.975 69.565,48.384 68.702,47.521 B4.3 ; U1.9 82.035,67.732 v6(82.844,68.54)
  Bottom Layer w0.11: J2C.3 65.059,55.126 67.671,55.126 72.124,59.58 73.394,59.58 79.407,65.593 79.407,65.76 81.586,67.938 81.735,67.938 82.337,68.54 v6(82.844,68.54)
  other v5: 82.844,68.54
D4_N: B5.6 J2D.2 U1.11 | length 50.8
  Top Layer w0.11: U1.11 80.435,66.432 80.553,66.313 80.553,66.29 80.618,66.226 82.546,66.226 v3(82.804,66.484) ; B5.6 103.378,59.969 102.845,59.436 101.219,59.436 101.008,59.647 100.917,59.647 100.852,59.582 100.852,59.446 101.392,58.906 101.392,58.231 101.71,57.912 104.857,57.912 105.144,57.625 107.729,57.625 108.147,57.207 108.147,55.741 107.532,55.126 106.883,55.126 J2D.2
  Bottom Layer w0.11: v3(82.804,66.484) 82.546,66.226 81.563,66.226 81.297,65.96 81.297,65.307 82.071,64.533 89.911,64.533 99.317,55.126 105.121,55.126 J2D.2
  other v4: 82.804,66.484
D4_P: B5.3 J2D.3 U1.12 | length 50.5
  Top Layer w0.11: U1.12 80.435,65.782 80.553,65.901 80.553,65.924 80.618,65.988 82.546,65.988 v3(82.804,65.73) ; B5.3 101.478,62.969 100.615,62.106 100.615,59.347 101.154,58.808 101.154,58.133 101.612,57.675 104.758,57.675 104.976,57.457 105.045,57.388 107.631,57.388 107.909,57.109 107.909,55.839 107.434,55.364 106.883,55.364 J2D.3
  Bottom Layer w0.11: v3(82.804,65.73) 82.546,65.988 81.661,65.988 81.534,65.861 81.534,65.405 82.169,64.77 90.009,64.77 99.415,55.364 105.121,55.364 J2D.3
  other v4: 82.804,65.73
DVDD: C6.1 FB1.1 R6.2 R7.2 U1.24 | length 14.4
  Top Layer w0.3: R6.2 84.782,61.026 85.659,61.026 87.491,59.194 R7.2 ; U1.24 91.777,70.332 C6.1
  Top Layer w0.5: FB1.1 90.613,71.51 91.484,70.639 C6.1 C6.1@92.668,70.639
DVDD_LED: ALL_ON.A R7.1 | length 1.5
  Top Layer w0.3: ALL_ON.A 84.461,57.791 85.985,57.791 R7.1
GND: B1.4 B1.7 B2.4 B2.7 B3.4 B3.7 B4.4 B4.7 B5.4 B5.7 C1.1 C2.1 C3.2 C4.1 C5.1 C6.2 C7.1 C8.1 C9.1 C10A.1 C10B.1 C10C.1 C10D.1 C11A.2 C11B.2 C11C.2 C11D.2 C12.1 C13.1 C14.1 C15.2 C16.1 J1.5 J1.S1 J1.S2 J1.S3 J1.S4 J1.S5 J1.S6 J2A.4 J2A.SH1 J2A.SH2 J2B.4 J2B.SH1 J2B.SH2 J2C.4 J2C.SH1 J2C.SH2 J2D.4 J2D.SH1 J2D.SH2 J3.2 R1.1 R4.1 R8.1 U1.15 | length 182.7
  Top Layer w0.5: J2C.SH1 61.468,58.039 60.452,57.023 60.452,53.594 61.214,52.832 61.214,48.929 J2C.SH2 ; J2B.SH2 J2B.SH2@61.468,75.882 ; J2B.SH1 61.468,85.09 59.944,83.566 59.944,80.01 61.468,78.486 J2B.SH2@61.468,75.882 ; J2C.4 64.178,51.565 61.468,48.855 J2C.SH2 ; J2B.4 J2B.4@64.178,78.592 ; C10C.1 68.346,59.673 C11C.2 68.6,60.527 69.992,61.919 70.936,61.919 v8(70.993,61.976) ; C10B.1 68.396,86.7 C11B.2 70.571,86.954 v4(72.39,88.773) ; B4.4 68.702,49.421 68.152,48.871 B4.7 67.556,48.675 J2C.SH2 ; B3.4 68.702,76.472 68.152,75.922 B3.7 67.728,75.946 64.897,75.946 64.178,76.665 J2B.4@64.178,78.592 ; v2(73.533,51.816) C15.2 76.2,51.825 C16.1 ; C13.1 74.172,63.75 74.172,62.488 v2(74.168,62.484) 74.195,62.484 74.576,62.103 76.304,62.103 77.701,63.5 C4.1 ; C5.1 75.057,76.35 76.143,77.436 76.143,78.302 v8(76.2,78.359) ; v8(79.356,87.634) 79.987,88.265 J1.S6 J1.S5 J1.S4 J1.S3@88.29,88.265 ; v2(82.042,58.293) 82.042,58.302 82.78,59.04 R8.1 82.78,60.425 82.423,60.782 C14.1 ; B1.4 81.854,76.205 81.304,76.755 B1.7 81.304,81.256 v6(81.28,81.28) 81.28,84.305 82.602,85.627 J1.S2 82.687,85.605 J1.5 ; U1.15 87.256,64.516 88.646,64.516 89.085,64.955 89.085,65.844 C8.1 89.985,65.844 89.985,65.082 90.297,64.77 90.297,64.666 91.821,63.142 C2.1 91.371,62.542 91.371,61.526 90.697,60.852 90.189,60.852 v2(90.17,60.833) ; J1.S1 87.578,87.552 J1.S3@88.29,88.265 ; J1.S3 J1.S3@88.29,88.265 ; C9.1 95.9,66.309 98.818,66.309 v2(98.832,66.323) ; C6.2 95.885,71.138 C7.1 95.898,74.816 97.777,74.816 v2(97.79,74.803) ; v2(98.425,46.101) 98.933,46.609 98.933,48.387 99.969,49.423 101.005,49.423 101.555,49.973 C11D.2 101.809,50.827 101.809,53.676 101.854,53.721 101.845,53.721 C10D.1 ; B5.4 101.478,61.069 102.028,61.619 B5.7 102.624,61.815 J2D.SH2 ; B2.4 101.478,88.12 102.028,88.67 B2.7 102.6,88.842 J2A.SH2 J2A.SH2@108.712,88.662 ; C10A.1 C11A.2 102.366,77.601 v2(103.378,78.613) ; J2A.4 106.002,85.952 J2A.SH2@108.712,88.662 ; J2A.SH1 108.712,76.116 110.236,77.64 110.236,86.904 108.712,88.428 J2A.SH2@108.712,88.662 ; J2B.SH2@61.468,75.882 J2B.4@64.178,78.592
  other v1: 98.425,46.101 73.533,51.816 82.042,58.293 90.17,60.833 74.168,62.484 98.832,66.323 97.79,74.803 103.378,78.613
  other v5: 81.28,81.28
  other v7: 70.993,61.976 83.439,69.723 83.82,72.263
  other v9: 84.074,66.167
  other v10: 79.356,87.634 72.39,88.773
  other v11: 76.2,78.359
MSFT: Q1.G R10.1 | length 4.3
  Top Layer w0.3: Q1.G 82.997,50.889 83.708,51.6 84.25,51.6 84.974,52.324 R10.1
OVCUR1#: R2.1 R3.1 R3.2 R4.2 U1.21 | length 24
  Top Layer w0.3: v4(85.2,68.375) 85.207,68.382 U1.21 ; R2.1 97.3,64.008 97.416,64.124 v3(97.47,64.124)
  Top Layer w0.4: R3.1 R3.2 R4.2 R2.1
  Bottom Layer w0.3: v4(85.2,68.375) 86.154,67.421 94.174,67.421 v3(97.47,64.124)
  other v3: 85.2,68.375
  other v4: 97.47,64.124
PGANG: ALL_ON.K R6.1 U1.18 | length 10.3
  Top Layer w0.3: ALL_ON.K 84.355,59.297 84.105,59.547 84.105,59.647 83.693,60.059 83.693,62.173 83.869,62.349 84.459,62.349 R6.1 ; R6.1@84.582,62.853 84.455,62.98 84.455,65.532 85.355,66.432 U1.18
PSELF: J3.3 R9.2 R10.2 U1.17 | length 26.6
  Top Layer w0.3: U1.17 85.467,65.782 85.214,65.529 85.214,65.281 85.217,65.278 85.217,63.754 85.725,63.246 85.725,62.406 85.901,62.23 87.63,62.23 89.281,60.579 89.281,53.606 R10.2 R9.2 87.999,50.954 89.289,49.664 J3.3
RESET#: C14.2 R5.1 R8.2 U1.13 | length 6.8
  Top Layer w0.3: R5.1 79.817,62.037 C14.2 80.137,62.507 81.407,63.777 81.407,64.897 81.172,65.132 U1.13
RREF: R1.2 U1.4 | length 3.1
  Top Layer w0.3: R1.2 77.712,72.29 77.962,72.04 78.062,72.04 78.22,71.882 78.437,71.882 78.613,71.706 78.613,71.247 78.878,70.982 U1.4
USB_PTCA: C10A.2 F1A.1 FB2A.2 | length 3.7
  Top Layer w0.4: F1A.1 98.97,82.065 FB2A.2@99.35,82.445 ; C10A.2 99.35,80.825 FB2A.2@99.35,82.445 ; FB2A.2 99.356,82.451 FB2A.2@99.35,82.445
USB_PTCB: C10B.2 F1B.1 FB2B.2 | length 3.9
  Top Layer w0.4: C10B.2 70.682,82.358 70.924,82.116 FB2B.2 72.436,82.016 F1B.1
USB_PTCC: C10C.2 F1C.1 FB2C.2 | length 4
  Top Layer w0.4: FB2C.2 70.753,55.086 70.753,56.622 C10C.2 72.767,56.743 F1C.1
USB_PTCD: C10D.2 F1D.1 FB2D.2 | length 3.9
  Top Layer w0.4: F1D.1 98.023,55.523 FB2D.2 99.402,55.402 99.402,53.878 C10D.2
VBUS: FB3.1 J1.1 | length 2.2
  Top Layer w0.3: J1.1 86.465,85.53 86.465,84.843 87.388,83.92 FB3.1
VCC_USBA: C11A.1 FB2A.1 J2A.1 | length 14.3
  Top Layer w0.4: FB2A.1 102.674,82.551 103.775,81.45 103.775,80.999 J2A.1 102.23,75 102.23,73.901 C11A.1
VCC_USBB: C11B.1 FB2B.1 J2B.1 | length 14.7
  Top Layer w0.4: C11B.1 68.05,90.654 68.05,89.644 J2B.1 66.525,83.425 66.525,82.45 66.959,82.016 FB2B.1
VCC_USBC: C11C.1 FB2C.1 J2C.1 | length 14.5
  Top Layer w0.4: C11C.1 68,63.627 68,62.567 J2C.1 66.575,56.348 66.575,55.625 67.235,54.965 FB2C.1
VCC_USBD: C11D.1 FB2D.1 J2D.1 | length 14.8
  Top Layer w0.4: FB2D.1 102.777,55.523 104,54.3 104,53.15 104.285,52.865 104.882,52.865 J2D.1 105.448,51.191 105.448,50.766 101.555,46.873 C11D.1
X1: C12.2 U1.6 XTAL.1 | length 7.1
  Top Layer w0.3: XTAL.1 74.976,67.717 XTAL.1@75.126,67.717 ; C12.2 75.176,67.767 XTAL.1@75.126,67.717 ; U1.6 78.826,69.682 77.295,68.151 76.533,68.151 76.099,67.717 XTAL.1@75.126,67.717
X2: C13.2 U1.7 XTAL.2 | length 10.4
  Top Layer w0.3: XTAL.2@75.026,65.267 XTAL.2 74.826,64.917 75.176,64.567 C13.2 75.819,63.754 76.073,64.008 76.073,66.675 77.089,67.691 77.724,67.691 79.041,69.008 79.886,69.008 U1.7
pads on no net: B1.2 B1.5 B2.2 B2.5 B3.2 B3.5 B4.2 B4.5 B5.2 B5.5 J1.4 U1.14 U1.19 U1.20 U1.22
copper on no net: | length 254
  Top Layer w0.254: 51.435,43.18 ccw(c52.705,43.18) 52.705,41.91 53.975,41.91 69.85,41.91 71.12,41.91 74.295,41.91 cw(c74.295,40.64) 75.565,40.64 75.565,39.497 75.565,36.83 75.565,35.56 ccw(c76.835,35.56) 76.835,34.29 78.105,34.29 92.075,34.29 93.345,34.29 ccw(c93.345,35.56) 94.615,35.56 94.615,36.83 94.615,39.37 94.615,40.64 cw(c95.885,40.64) 95.885,41.91 97.155,41.91 98.425,41.91 99.695,41.91 116.205,41.91 117.475,41.91 ccw(c117.475,43.18) 118.745,43.18 118.745,44.45 118.745,46.355 118.745,91.44 118.745,92.71 ccw(c117.475,92.71) 117.475,93.98 116.205,93.98 95.885,93.98 ccw(c95.885,92.71) 94.615,92.71 94.615,91.821 cw(c93.599,91.821) 93.599,90.805 76.835,90.805 cw(c76.835,92.075) 75.565,92.075 75.565,92.837 ccw(c74.422,92.837) 74.422,93.98 74.295,93.98 53.975,93.98 52.705,93.98 ccw(c52.705,92.71) 51.435,92.71 51.435,91.44 51.435,46.355 51.435,45.085 51.435,44.45 51.435,43.18

## Polygon pours and split planes (outlines as drawn)
+5V on Top Layer "+5V_L01_P-001" (solid, pour order 3): 50.8,94.742 119.507,94.742 119.507,41.148 119.38,41.275 95.885,41.275 95.885,33.655 95.631,33.401 74.803,33.401 74.803,40.513 74.676,40.64 50.292,40.64
GND on GND_1 (split plane): 179 vertices, not listed, extent 51.944,34.799 118.236,93.471
GND on GND_2 (split plane): 179 vertices, not listed, extent 51.944,34.799 118.236,93.471

## Other copper
Top Layer:
  region net GND: 74.226,77.181 74.32,77.275 75.748,77.275 76.015,77.008 76.015,73.219 76.088,73.147 76.459,73.147 76.708,72.898 76.708,71.882 76.279,71.453 75.982,71.453 75.982,69.725 75.727,69.469 74.803,69.469 74.635,69.089 74.635,68.199 74.676,68.199 74.422,68.072 73.914,68.072 73.645,68.178 73.787,76.581
  region net +VCC: 90.932,67.056 91.186,67.31 94.234,67.31 94.488,67.056 94.488,63.119 94.361,62.992 93.218,62.992 93.091,63.119 93.091,64.897 92.583,65.278 91.186,65.278 90.932,65.532

## Text inside footprints (layer, text, board x,y; h text height)
ALL_ON: Mechanical 13 "+" at 85.063,57.23 h0.5 r270
J1: Mechanical 13 "PCB EDGE" at 80.59,89.515 h0.41 r180
J2A: Mechanical 13 "PCB EDGE" at 118.912,90.872 h1 r90
J2B: Mechanical 13 "PCB EDGE" at 51.268,73.672 h1 r270
J2C: Mechanical 13 "PCB EDGE" at 51.268,46.645 h1 r270
J2D: Mechanical 13 "PCB EDGE" at 118.912,63.845 h1 r90